# Altium PCB seminar_pcb.PcbDoc
Units mm, origin at the board's own origin, x right, y up, seen from the top; angles counter-clockwise.
Board outline 39.5 x 16.25 mm, 2 copper layers (Top Layer, Bottom Layer), stack 1.57 mm thick; 28 components, 20 nets, 130 pads, 53 vias.
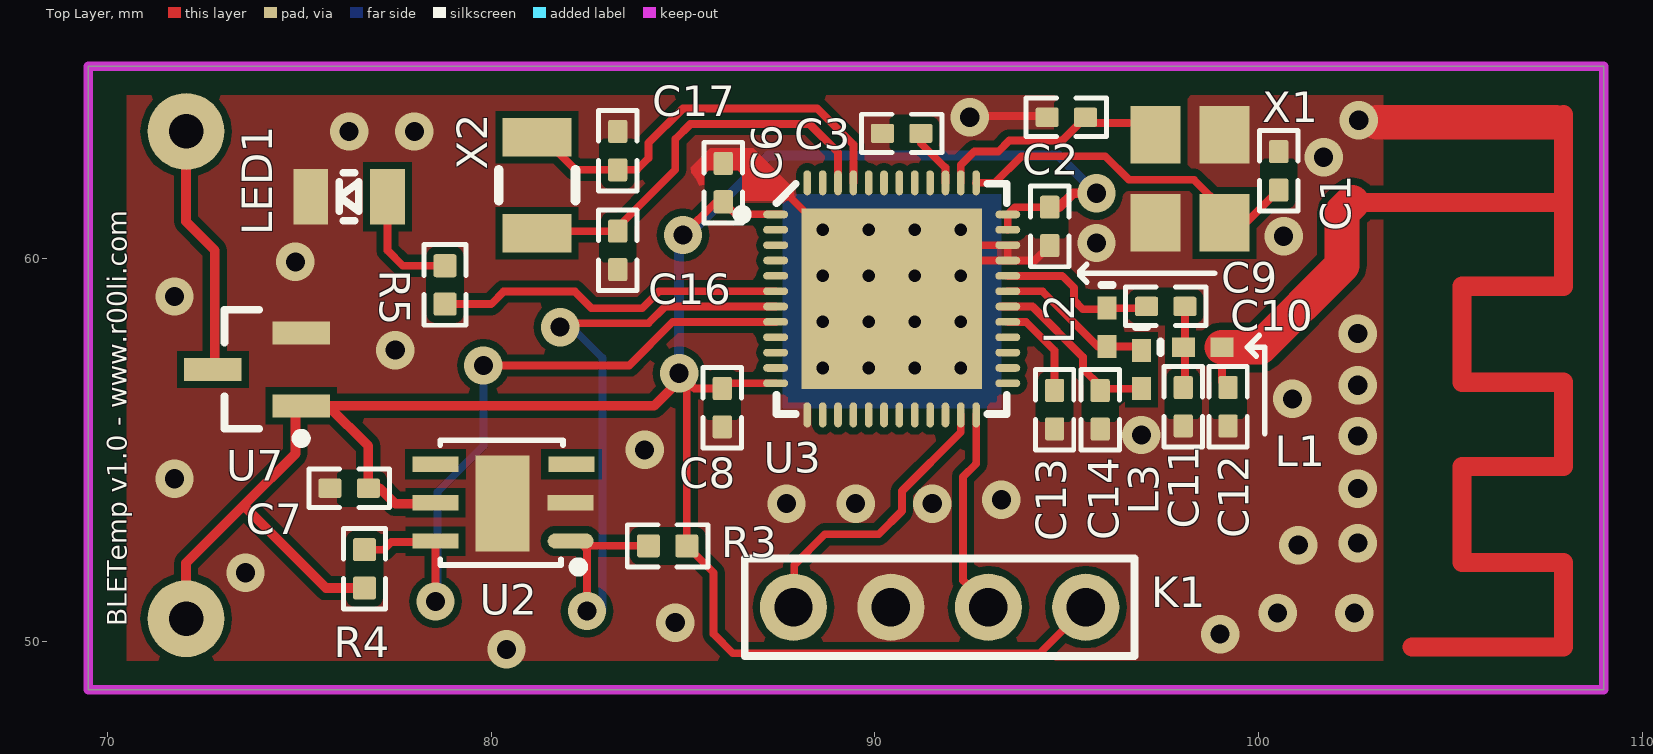
[diagram p0: Top Layer view]
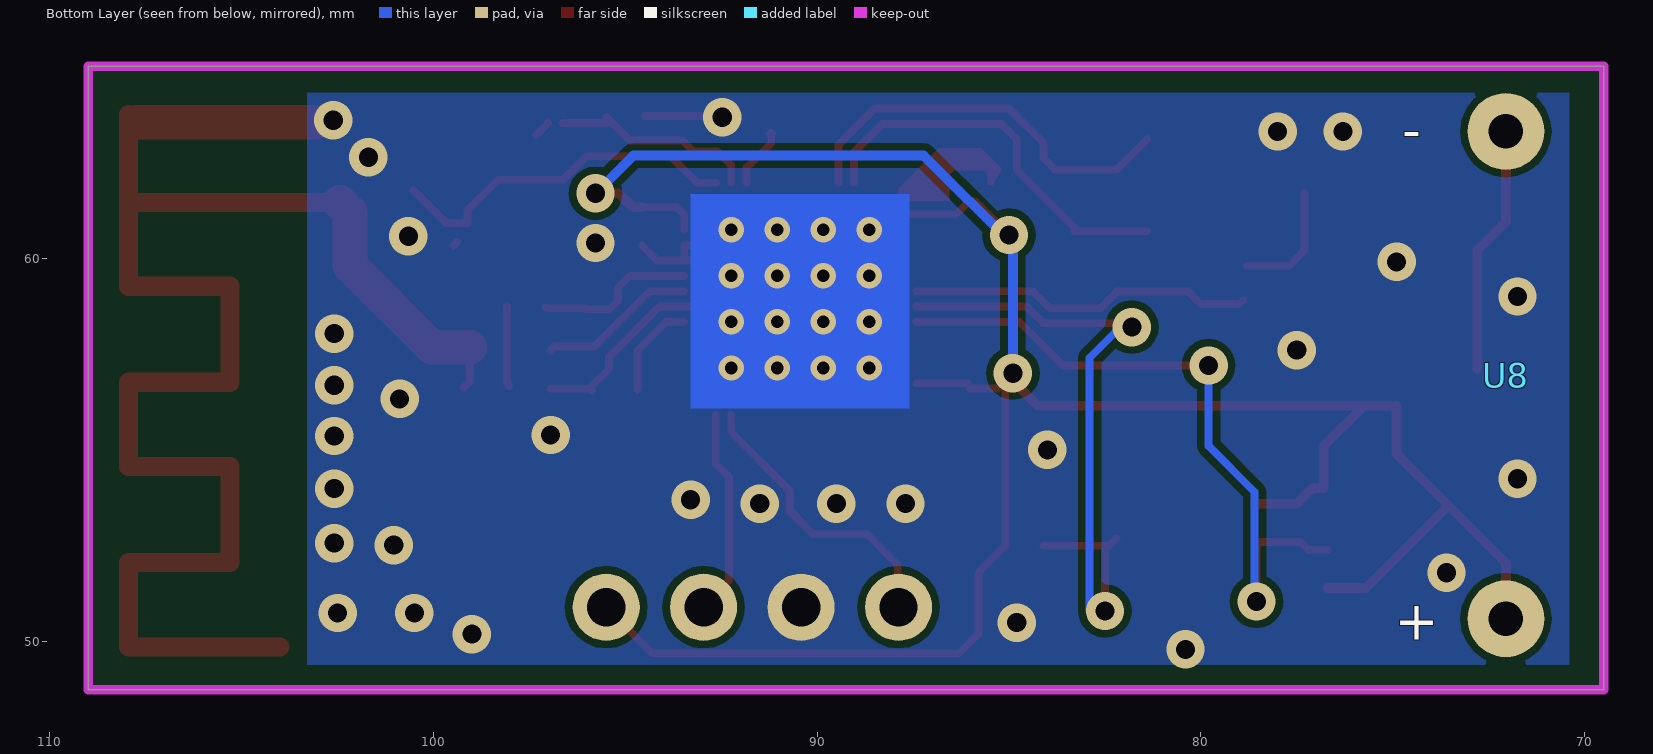
[diagram p1: Bottom Layer view, seen from below]

## Layer stack, top to bottom
Top Solder: solder mask 0.015, Solder Resist, Dk 3.5
Top Layer: signal copper 0.035
Dielectric1: core 1.5, FR-4, Dk 4.2
Bottom Layer: signal copper 0.035
Bottom Solder: solder mask 0.015, Solder Resist, Dk 3.5

## Board outline
69.5,48.75 69.5,65 109,65 109,48.75

## Design rules (kind name [scope] priority, off if disabled: settings)
Clearance [All] p1: gap=0.191 except(0: Arc-Text Track-Text Fill-Text Poly-Text Region-Text Text-Text)
HoleSize [All] p1: absolutevalues=TRUE maxlimit=6.3 minlimit=0.3 maxpercent=80.000 minpercent=20.000
HoleToHoleClearance [All] p1: gap=0.203 allowstackedmicrovias=FALSE
MinimumAnnularRing [All] p1: minimumring=0.152
MinimumSolderMaskSliver [All] p1: minsoldermaskwidth=0
PolygonConnect No_thermal [(InNet('GND') AND InComponent('U2'))] p1: connectstyle=Direct reliefconductorwidth=0.254 reliefentries=4 polygonreliefangle="90 Angle" airgapwidth=0.254
PolygonConnect [All] p2: connectstyle=Direct reliefconductorwidth=0.254 reliefentries=4 polygonreliefangle="90 Angle" airgapwidth=0.254
RoutingVias [All] p1: holewidth=0.711 width=1.27 viastyle="Through Hole" minholewidth=0.711 minwidth=1.27 maxholewidth=0.711 maxwidth=1.27
SilkToSilkClearance [All] p1: silktosilkclearance=0
SilkToSolderMaskClearance [IsPad] p1: minsilkscreentomaskgap=0 clearancetoexposedcopper=TRUE
SolderMaskExpansion [All] p1: expansion=0.04
Width [All] p1: maxlimit=2.54 minlimit=0.19 preferedwidth=0.254
25 further rules are at their usual default settings.

## Components (designator, comment, footprint, x,y, rotation, side; value= is the part's Value field where it differs from the comment)
C1 "12p" CAPC1005X55N 100.529,62.273 r90 top
C2 "12p" CAPC1005X55N 94.992,63.67 r180 top
C3 "100n" CAPC1005X55N 90.701,63.249 r0 top
C6 "100n" CAPC1005X55N 86.051,61.968 r90 top
C7 "100n" CAPC1005X55N 76.3,54 r180 top
C8 "100n" CAPC1005X55N 86.026,56.1 r270 top
C9 "1n" CAPC1005X55N 94.56,60.825 r270 top
C10 "3.9p" CAPC1005X55N 97.583,58.742 r0 top
C11 "1p" CAPC1005X55N 98.04,56.126 r270 top
C12 "1.5p" CAPC1005X55N 99.208,56.126 r270 top
C13 "47n" CAPC1005X55N 94.687,56.05 r270 top
C14 "2.2n" CAPC1005X55N 95.876,56.045 r270 top
C16 "12p" CAPC1005X55N 83.3,60.2 r270 top
C17 "12p" CAPC1005X55N 83.3,62.8 r90 top
K1 "SWD" H1x4 95.5,50.9 r0 top
L1 "3.3n" 0402-A 98.548,57.675 r0 top
L2 "4.7n" 0402-A 96.051,58.195 r270 top
L3 "27n" 0402-A 96.951,57.095 r270 top
LED1 "Status LED" LED0805 76.3,61.6 r180 top
R3 "4.7k" RESC1005X40N 84.6,52.5 r180 top
R4 "4.7k" RESC1005X40N 76.7,51.9 r90 top
R5 "100" RESC1005X40N 78.8,59.3 r270 top
U2 "SHT21" DFN6 80.4,53.8 r180 top
U3 "nRF51422-QFAC" QFN40P600X600X90-48N 90.442,58.936 r0 top
U7 "IRLML6344TRPBF" SOT-23A-CB3_N 73.9,57.1 r180 top
U8 "Keystone 2468" "AAA battery holder" 97.25,57.25 r180 bottom
X1 "16Mhz" kvarc 98.217,62.065 r90 top
X2 "FC-135" "FC-135 (3215)" 81.2,61.9 r90 top

## Footprints (in the part's own frame and the unit in brackets; to place one, negate y for a bottom-side part, rotate by r counter-clockwise, add the part's x,y. Pads: shape width x height; smd on the part's side, far side on the other; paste and mask are expansions set on the pad)
0402-A [mm] "Chip Inductor, Body 1.0x0.5mm, IPC High Density"
  rect 0.6x0.5 smd: 1(-0.5,0) 2(0.5,0)
  silkscreen extent -1.1,-0.15 -1.1,0.15, body extent -0.55,-0.3 0.55,0.3, height 0.55
"AAA battery holder" [mm]
  round 2 hole 0.9: 1(25.2,-6.65) 2(25.2,6.05)
CAPC1005X55N [mm]
  round 0.2 on Mech15: 0(0,0)
  rrect20% 0.6x0.5 smd: 1(-0.5,0) 2(0.5,0)
  Top Layer pour cut-out: -0.325,0.375 -0.2,0.5 0.2,0.5 0.325,0.375 0.325,-0.375 0.2,-0.5 -0.2,-0.5 -0.325,-0.375
  silkscreen extent -1.05,-0.5 1.05,0.5, body extent -0.52,-0.27 0.53,0.28, height 0.55
DFN6 [mm]
  oval 1.2x0.4 smd: 1(-1.675,1.175)
  rect 1.2x0.4 smd: 2(-1.675,0.175) 3(-1.7,-0.825) 4(1.85,-0.825) 5(1.85,0.175) 6(1.85,1.175)
  rect 1.4x2.5 smd: ""(0.1,0.2)
  silkscreen extent -2,-1.45 1.73,1.97, body extent -1.38,-1.32 1.65,1.67, height 1.14
"FC-135 (3215)" [mm]
  rect 1x1.8 smd: 0(1.25,0) 1(-1.25,0)
  silkscreen extent -0.4,-1 0.4,1
H1x4 [mm]
  round 1.75 hole 1: 1(0,0) 2(-2.54,0) 3(-5.08,0) 4(-7.62,0)
  silkscreen extent -8.89,-1.27 1.27,1.27, body extent -8.89,-1.27 1.27,1.27, height 8.4
kvarc [mm]
  rect 1.5x1.3 smd: 1(-1.15,-0.9) 2(1.15,-0.9) 3(1.15,0.9) 4(-1.15,0.9)
  body extent -1.65,-1.27 1.65,1.33, height 0.8
LED0805 [mm] "LED SMD 0805"
  rect 0.9x1.45 smd: 1(-1,0) 2(1,0)
  silkscreen extent -0.25,-0.63 0.25,0.63, body extent -1.02,-0.46 1.04,0.45, height 0.85
QFN40P600X600X90-48N [mm]
  oval 0.65x0.2 smd: 1(-3.025,2.2) 2(-3.025,1.8) 3(-3.025,1.4) 4(-3.025,1) 5(-3.025,0.6) 6(-3.025,0.2) 7(-3.025,-0.2) 8(-3.025,-0.6) 9(-3.025,-1) 10(-3.025,-1.4) 11(-3.025,-1.8) 12(-3.025,-2.2) 25(3.025,-2.2) 26(3.025,-1.8) 27(3.025,-1.4) 28(3.025,-1) 29(3.025,-0.6) 30(3.025,-0.2) 31(3.025,0.2) 32(3.025,0.6) 33(3.025,1) 34(3.025,1.4) 35(3.025,1.8) 36(3.025,2.2)
  oval 0.2x0.65 smd: 13(-2.2,-3.025) 14(-1.8,-3.025) 15(-1.4,-3.025) 16(-1,-3.025) 17(-0.6,-3.025) 18(-0.2,-3.025) 19(0.2,-3.025) 20(0.6,-3.025) 21(1,-3.025) 22(1.4,-3.025) 23(1.8,-3.025) 24(2.2,-3.025) 37(2.2,3.025) 38(1.8,3.025) 39(1.4,3.025) 40(1,3.025) 41(0.6,3.025) 42(0.2,3.025) 43(-0.2,3.025) 44(-0.6,3.025) 45(-1,3.025) 46(-1.4,3.025) 47(-1.8,3.025) 48(-2.2,3.025)
  rect 4.7x4.7 smd: 49(0,0)
  silkscreen extent -4.02,-3 3,3, body extent -3,-3 3,3, height 0.9
RESC1005X40N [mm]
  round 0.2 on Mech15: 0(0,0)
  rrect20% 0.6x0.6 smd: 1(-0.5,0) 2(0.5,0)
  Top Layer pour cut-out: -0.325,0.375 -0.2,0.5 0.2,0.5 0.325,0.375 0.325,-0.375 0.2,-0.5 -0.2,-0.5 -0.325,-0.375
  silkscreen extent -1.05,-0.55 1.05,0.55, body extent -0.52,-0.27 0.53,0.28, height 0.4
SOT-23A-CB3_N [mm]
  rect 1.5x0.6 smd: 1(-1.15,0.95) 2(-1.15,-0.95) 3(1.15,0)
  silkscreen extent -1.28,-1.55 0.85,1.92, body extent -0.85,-1.55 0.85,1.55, height 1.45

## Part data
C1 C2 C9 C10 C11 C12 C14 C16 C17: library part CAPC_1n_0402_X7R_16V_10%, "Capacitor SMD Cer 1nF 10% 16V X7R 0402"
C3 C6 C7 C8: library part CAPC_1n_0402_X7R_16V_10%, "Capacitor SMD Cer 100nF 10% 10V X7R 0402"
C13: library part CAPC_1n_0402_X7R_16V_10%, "Capacitor SMD Cer 47nF 10% 10V X7R 0402"
K1: library part H1x4, "Header 1x4 (male)"
L1 L2 L3: library part Inductor, "Inductor"
LED1: library part LED, "LED"
R3 R4 R5: library part RES_1K_0402_5%, "Resistor SMD chip 1k Ohm 0.063W 5% 0402"
U2: library part SHT25, "SHT21 temp. and hum. sensor"
U3: "Multi-protocol Bluetooth Low Energy, ANT and 2.4GHz proprietary system-on-chip"
U8: "AAA battery holder"
X1: library part 7M-16.000MEEQ-T, "16Mhz smd quartz"
X2: "32.768KHZ crystal"

## Via types
v1: diameter 1, hole 0.5, Top Layer to Bottom Layer, tented both sides, 37 vias
v2: diameter 0.66, hole 0.33, Top Layer to Bottom Layer, 16 vias

## Nets (pads, with @x,y where several pads share a name; then routed paths per layer and width w, separated by ;. In a path a pad name is that pad's centre, name@x,y a point inside that pad or via, vN(x,y) a via of type N, cw(c..) or ccw(c..) an arc to the next point about the centre after c; other vN are vias at no path point)
GND: C1.2 C2.2 C3.1 C6.2 C7.2 C8.2 C9.2 C11.2 C12.2 C13.2 C14.2 C16.2 C17.2 K1.3 LED1.2 U2. U2.2 U3.13 U3.33 U3.34 U3.49 U7.2 X1.2 X1.4 | length 14.4
  Top Layer w0.203: 87.626,61.773 87.626,61.752 v2(88.642,60.736) ; U3.49@88.242,56.736 88.242,56.868 U3.49@88.261,56.888 ; U3.49 U3.49@90.454,58.936 ; U3.49@92.223,59.961 92.248,59.936 U3.33 U3.33@93.467,59.938 ; U3.49@92.223,60.368 92.255,60.336 U3.34 U3.33@93.467,59.938 ; v1(92.477,63.67) 92.508,63.7 C2.2@94.5,63.7 ; v1@92.7,63.579 v1@92.762,63.517 ; C9.2 94.173,59.938 U3.33@93.467,59.938
  Top Layer w0.254: U3.49@88.242,56.736 U3.49@88.327,56.822 ; v2(88.642,57.136) v2(89.842,58.336)
  Top Layer w0.9: v1@103.077,63.54 107.752,63.54
  other v1: 80.4,49.8 99,50.2 84.8,50.5 100.5,50.75 102.5,50.75 73.6,51.8 101.037,52.519 102.587,52.57 87.7,53.6 89.5,53.6 91.5,53.6 93.3,53.7 102.587,53.992 71.75,54.25 84,55 102.587,55.364 96.948,55.389 100.885,56.329 102.587,56.685 77.5,57.6 102.587,58.031 71.75,59 74.9,59.9 95.779,60.393 100.656,60.571 101.698,62.628 76.3,63.3 78,63.3 102.612,63.593
  other v2: 89.842,57.136 91.042,57.136 92.242,57.136 88.642,58.336 91.042,58.336 92.242,58.336 88.642,59.536 89.842,59.536 91.042,59.536 92.242,59.536 89.842,60.736 91.042,60.736 92.242,60.736
NetC1_1: C1.1 U3.37 X1.1 | length 9.6
  Top Layer w0.203: U3.37 93.129,61.961 93.824,62.656 96.008,62.656 96.624,62.04 98.317,62.04 99.117,61.24 X1.1 99.671,60.915 C1.1 ; X1.1@99.39,60.416 X1.1@99.481,60.326
NetC2_1: C2.1 U3.38 X1.3 | length 5.9
  Top Layer w0.203: U3.38 92.242,62.425 92.598,62.781 ; 92.604,62.774 93.219,62.774 93.507,63.062 94.885,63.062 C2.1 95.492,63.517 96.634,63.517 ; X1.3@97.015,63.517 X1.3
NetC3_2: C3.2 U3.39 | length 1.6
  Top Layer w0.203: C3.2@91.176,63.249 C3.2 ; C3.2@91.201,63.174 91.201,62.995 91.838,62.358 ; C3.2@91.201,63.274 C3.2@91.251,63.224 ; U3.39 91.842,62.358
NetC10_1: C10.1 L2.1 U3.32 | length 4.2
  Top Layer w0.203: U3.32 94.883,59.536 95.195,59.225 95.195,58.894 95.424,58.666 96.022,58.666 L2.1 97.051,58.695 C10.1@97.076,58.72
NetC10_2: C10.2 C11.1 L1.1 | length 2.1
  Top Layer w0.203: C11.1@98.04,56.651 98.048,56.659 C11.1@98.048,56.718 ; C11.1@98.04,56.71 C11.1@98.048,56.718 ; C10.2 98.083,56.753 C11.1@98.048,56.718
NetC12_1: C12.1 L1.2 | length 40.8
  Top Layer w0.203: L1.2 99.048,56.786 C12.1
  Top Layer w0.5: 102.442,61.451 107.952,61.451 ; 104.004,49.865 107.952,49.865 107.952,52.065 105.302,52.065 105.302,54.565 107.952,54.565 107.952,56.765 105.302,56.765 105.302,59.265 107.952,59.265 107.952,61.451 ; 107.952,63.74 107.952,61.451
  Top Layer w0.91: L1.2 100.047,57.675 102.18,59.809 102.18,61.189 102.442,61.451
NetC13_1: C13.1 U3.29 | length 2.5
  Top Layer w0.203: U3.29 93.939,58.336 94.687,57.588 C13.1@94.687,56.575
NetC14_1: C14.1 L3.2 U3.30 | length 4.8
  Top Layer w0.203: U3.30@93.29,58.742 93.296,58.736 U3.30 94.109,58.736 95.424,57.421 95.424,57.117 95.876,56.665 C14.1 95.926,56.595 L3.2
NetC16_1: C16.1 U3.46 X2.1 | length 10.3
  Top Layer w0.204: X2.1@81.4,60.7 C16.1 ; C16.1@83.3,60.8 84.8,62.3 84.8,63.1 85.196,63.496 ; 85.2,63.5 85.196,63.496 ; U3.46 89.042,62.754 88.3,63.496 85.196,63.496
NetC17_1: C17.1 U3.45 X2.0 | length 10.7
  Top Layer w0.204: X2.0@81.4,63.1 82.2,62.3 C17.1 83.8,62.3 84.1,62.6 84.1,63 85,63.9 88.5,63.9 89.442,62.958 U3.45
NetK1_2: K1.2 U3.24 | length 5.4
  Top Layer w0.2: 92.642,54.642 U3.24
  Top Layer w0.204: 92.642,54.642 92.3,54.3 92.3,51.6 K1.2@93,50.9
NetK1_4: K1.4 U3.23 | length 7.6
  Top Layer w0.2: 92.242,55.462 U3.23
  Top Layer w0.204: K1.4@87.9,50.9 87.9,52 88.7,52.8 90.1,52.8 90.707,53.408 90.707,53.928 92.242,55.462
NetL2_2: L2.2 L3.1 U3.31 | length 4.1
  Top Layer w0.203: U3.31 94.369,59.136 95.811,57.695 L2.2 96.851,57.695 L3.1
NetLED1_A: LED1.1 R5.1 | length 3.2
  Top Layer w0.204: LED1.1@77.3,61.7 LED1.1 77.3,60.2 77.7,59.8 R5.1
NetR3_2: R3.2 U2.1 U3.7 | length 18
  Top Layer w0.203: v1(81.8,58.2) 81.9,58.3 84.1,58.3 84.536,58.736 U3.7 ; U2.1@82.2,52.7 U2.1@82.4,52.5 ; v1(82.5,50.8) 82.5,52.4 U2.1@82.4,52.5 ; R3.2 U2.1@82.4,52.5
  Bottom Layer w0.203: v1@81.8,58.3 82,58.3 82.9,57.4 82.9,50.8 v1(82.5,50.8)
NetR4_2: R4.2 U2.6 U3.8 | length 18.1
  Top Layer w0.203: R4.2 77.2,52.4 77.4,52.6 U2.6@78.5,52.6 ; v1(78.55,51.05) U2.6 ; v1(79.8,57.2) 83.6,57.2 84.736,58.336 U3.8
  Bottom Layer w0.203: v1@78.6,51.1 78.6,53.9 79.8,55.1 v1(79.8,57.2)
NetR5_2: R5.2 U3.6 | length 9.1
  Top Layer w0.204: R5.2@78.9,58.9 79,58.8 80,58.8 80.328,59.128 82.184,59.128 82.618,58.694 83.937,58.694 84.379,59.136 U3.6
NetU7_3: U7.3 U8.2 | length 6.5
  Top Layer w0.254: U8.2 72.05,60.95 72.8,60.2 U7.3@72.8,57.1
VCC: C6.1 C7.1 C8.1 C9.1 K1.1 R3.1 R4.1 U2.5 U3.1 U3.12 U3.35 U3.36 U7.1 U8.1 | length 67.2
  Top Layer w0.2: C8.1@86.078,56.736 U3.12
  Top Layer w0.203: v1(84.9,57) v1@85.1,56.8 ; v1(85,60.6) 85.868,61.468 C6.1 86.378,61.141 U3.1@87.575,61.141 ; C8.1 85.3,56.6 v1@85.1,56.8 ; U3.35 U3.36 93.655,61.325 C9.1 ; K1.1 94.3,49.7 86.3,49.7 85.8,50.2 85.8,51.8 R3.1 v1@85.1,56.8
  Top Layer w0.254: U8.1 72.05,52.05 73.6,53.6 ; U7.1@74.9,56.15 74.9,54.9 73.6,53.6 ; U7.1 U7.1@75.75,56.15 ; R4.1 75.7,51.4 73.6,53.5 73.6,53.6 ; U2.5@78.6,53.6 77.5,53.6 77.1,54 C7.1 76.8,55.1 U7.1@75.75,56.15 ; v1(84.9,57) 84.9,56.8 84.25,56.15 U7.1@75.75,56.15 ; C9.1 94.806,61.325 95.17,61.688 v1(95.779,61.688)
  Bottom Layer w0.254: v1(84.9,57) 84.9,60.349 87.226,62.674 94.793,62.674 v1(95.779,61.688)
pads on no net: C1.0 C2.0 C3.0 C6.0 C7.0 C8.0 C9.0 C10.0 C11.0 C12.0 C13.0 C14.0 C16.0 C17.0 R3.0 R4.0 R5.0 U2.3 U2.4 U3.2 U3.3 U3.4 U3.5 U3.9 U3.10 U3.11 U3.14 U3.15 U3.16 U3.17 U3.18 U3.19 U3.20 U3.21 U3.22 U3.25 U3.26 U3.27 U3.28 U3.40 U3.41 U3.42 U3.43 U3.44 U3.47 U3.48

## Polygon pours and split planes (outlines as drawn)
GND on Bottom Layer "Top Layer-No Net" (solid, remove dead copper, pour order 4): 70.405,49.395 70.405,64.314 103.298,64.314 103.298,49.395
GND on Top Layer "top_GND" (solid, pour order 3): 103.25,64.25 103.25,49.5 70.5,49.5 70.5,64.25

## Keep-outs
Keep-Out Layer:
  the board outline again, w0.254

## Other copper
Top Layer:
  pour cut-out: 87.728,61.511 87.728,56.227 93.138,56.227 93.189,56.278 93.189,61.511
  region net GND: 87.885,61.811 87.885,61.736 87.904,61.638 87.845,61.535 87.728,61.511 87.603,61.495 87.601,61.495 87.575,61.5 86.557,61.5 86.557,61.718 86.548,61.764 86.551,61.768 86.551,62.168 86.426,62.293 85.676,62.293 85.551,62.168 85.551,61.912 85.424,61.887 85.36,62.041 85.24,62.198 85.213,62.218 85.207,62.353 85.717,62.863 86.833,62.863
Bottom Layer:
  rectangle net GND: 87.601,56.074 93.301,61.674

## Silkscreen, mask and mechanical layers (free items; w line width, h text height)
Top Overlay:
  lines w0.15: 95.525,59.377 95.348,59.555 95.348,59.606 ; 95.525,59.834 95.348,59.656 95.348,59.606 ; 98.853,59.606 95.348,59.606 ; 99.945,57.447 99.716,57.675 ; 100.021,57.98 99.716,57.675 ; 100.161,55.427 100.161,57.675 99.97,57.675 99.716,57.675
  text "BLETemp v1.0 - www.r00li.com" at 70.5,50.4 h0.5 r90

## Text inside footprints (layer, text, board x,y; h text height)
U8: Bottom Overlay "-" at 74.75,62.85 h1; Bottom Overlay "+" at 74.95,50.05 h1